# EAGLE board Copy of TP 01 - Cronómetro Binario vuelta (EAGLE 9.7.0)

Size 91.8 x 97.08 mm. Coordinates in mm from the lower left corner, seen from the top.
Outline: 0,0 91.8,0 91.8,97.08 0,97.08 0,0
Copper layers (1*16): Top 0.035mm / dielectric 1.5mm / Bottom 0.035mm
Design rules "default": minimum track width 6mil, minimum drill 0.35mm, track to track 6mil, track to pad 6mil, pad to pad 6mil, via to via 6mil, smd to smd 6mil, copper to edge 40mil, drill to drill 6mil, minimum pad ring 10mil, minimum via ring 8mil, stop-mask expansion 4mil, vias tented up to drill 0mil, thermal gap 10mil

## Footprints (pad centres in the part's own frame; a part is rotated, then mirrored left to right if it is on the bottom)
LEDRD254W60D565H860B_W = drill 0.981 pad 1.581: 1 -1.27,0; 2 1.27,0
LEDRD254W60D565H860B_O = drill 0.981 pad 1.581: 1 -1.27,0; 2 1.27,0
LEDRD254W60D565H860B_Y = drill 0.981 pad 1.581: 1 -1.27,0; 2 1.27,0
LEDRD254W60D565H860B_G = drill 0.981 pad 1.581: 1 -1.27,0; 2 1.27,0
LEDRD254W60D565H860B_B = drill 0.981 pad 1.581: 1 -1.27,0; 2 1.27,0
RESAD1016W63L850D250B = drill 0.83 pad 1.43: 1 -5.08,0; 2 5.08,0
SWITCH-MOMENTARY-PTH-6.5MM = drill 1.016 pad 1.88: 1 -3.251,2.261; 2 3.251,2.261; 3 -3.251,-2.261; 4 3.251,-2.261
ARDUINO-UNO-R3-SHIELD = drill 1.016 pad 1.88: 3.3V 24.13,-2.54; 5V 24.13,0; A0 24.13,12.7; A1 24.13,15.24; A2 24.13,17.78; A3 24.13,20.32; A4 24.13,22.86; A5 24.13,25.4; AREF -24.13,-13.97; D2 -24.13,20.32; D3 -24.13,17.78; D4 -24.13,15.24; D5 -24.13,12.7; D6 -24.13,10.16; D7 -24.13,7.62; D8 -24.13,3.81; D9 -24.13,1.27; D10 -24.13,-1.27; D11 -24.13,-3.81; D12 -24.13,-6.35; D13 -24.13,-8.89; GND@0 24.13,2.54; GND@1 24.13,5.08; GND@2 -24.13,-11.43; IOREF 24.13,-7.62; NC 24.13,-10.16; RES 24.13,-5.08; RX -24.13,25.4; SCL -24.13,-19.05; SDA -24.13,-16.51; TX -24.13,22.86; VIN 24.13,7.62

## Placement (x,y rotation side)
D5  WHITE  [LEDRD254W60D565H860B_W]  6.06,89.17 180 top
D6  ORANGE  [LEDRD254W60D565H860B_O]  51.78,89.17 180 top
D7  ORANGE  [LEDRD254W60D565H860B_O]  46.7,89.17 180 top
D8  YELLOW  [LEDRD254W60D565H860B_Y]  41.62,89.17 180 top
D9  YELLOW  [LEDRD254W60D565H860B_Y]  36.54,89.17 180 top
D10  GREEN  [LEDRD254W60D565H860B_G]  31.46,89.17 180 top
D11  GREEN  [LEDRD254W60D565H860B_G]  26.38,89.17 180 top
D12  BLUE  [LEDRD254W60D565H860B_B]  21.3,89.17 180 top
D13  BLUE  [LEDRD254W60D565H860B_B]  16.22,89.17 180 top
D250  WHITE  [LEDRD254W60D565H860B_W]  11.14,89.17 180 top
R1  1k  [RESAD1016W63L850D250B]  73.56,82.89 90 top
R2  1k  [RESAD1016W63L850D250B]  81,83.3 90 top
R5  250  [RESAD1016W63L850D250B]  53.05,84.09 90 top
R6  250  [RESAD1016W63L850D250B]  47.97,84.09 90 top
R7  250  [RESAD1016W63L850D250B]  42.89,84.09 90 top
R8  250  [RESAD1016W63L850D250B]  37.81,84.09 90 top
R9  250  [RESAD1016W63L850D250B]  32.73,84.09 90 top
R10  250  [RESAD1016W63L850D250B]  27.65,84.09 90 top
R11  250  [RESAD1016W63L850D250B]  22.57,84.09 90 top
R12  250  [RESAD1016W63L850D250B]  17.49,84.09 90 top
R13  250  [RESAD1016W63L850D250B]  12.41,84.09 90 top
R14  250  [RESAD1016W63L850D250B]  7.33,84.09 90 top
S3  SWITCH_MOMENTARY  [SWITCH-MOMENTARY-PTH-6.5MM]  83.54,74.41 90 top
SRESET  SWITCH_MOMENTARY  [SWITCH-MOMENTARY-PTH-6.5MM]  76.1,74 90 top
U1  ARDUINO-UNO-R3-SHIELD  [ARDUINO-UNO-R3-SHIELD]  47.91,29.84 270 top

## Library data of the parts
D5 D250 = Tinkercad; CATEGORY: Opto-Electronic; SUB-CATEGORY: LED; VALUE: LED_WHITE
D6 D7 = Tinkercad; CATEGORY: Opto-Electronic; SUB-CATEGORY: LED; VALUE: LED_ORANGE
D8 D9 = Tinkercad; CATEGORY: Opto-Electronic; SUB-CATEGORY: LED; VALUE: LED_YELLOW
D10 D11 = Tinkercad; CATEGORY: Opto-Electronic; SUB-CATEGORY: LED; VALUE: LED_GREEN
D12 D13 = Tinkercad; CATEGORY: Opto-Electronic; SUB-CATEGORY: LED; VALUE: LED_BLUE
R1 R2 R5-R14 S3 SRESET U1 = Tinkercad

## Nets
D5_A: D5.1 R14.2
D6_A: D6.1 R5.2
D7_A: D7.1 R6.2
D8_A: D8.1 R7.2
D9_A: D9.1 R8.2
D10_A: D10.1 R9.2
D11_A: D11.1 R10.2
D12_A: D12.1 R11.2
D13_A: D13.1 R12.2
D250_A: D250.1 R13.2
U1_5V: S3.3 SRESET.3 U1.5V
U1_D2: R2.1 S3.1 S3.2 U1.D2
U1_D3: R1.1 SRESET.1 SRESET.2 U1.D3
U1_D4: R5.1 U1.D4
U1_D5: R6.1 U1.D5
U1_D6: R7.1 U1.D6
U1_D7: R8.1 U1.D7
U1_D8: R9.1 U1.D8
U1_D9: R10.1 U1.D9
U1_D10: R11.1 U1.D10
U1_D11: R12.1 U1.D11
U1_D12: R13.1 U1.D12
U1_D13: R14.1 U1.D13
U1_GND: D5.2 D6.2 D7.2 D8.2 D9.2 D10.2 D11.2 D12.2 D13.2 D250.2 R1.2 R2.2 U1.GND@0 U1.GND@1 U1.GND@2

## Tracks (layer width: path | path; a pad name or v marks a point on that pad's centre or on a via)
D5_A  (1 unrouted)
D6_A  (1 unrouted)
D7_A  (1 unrouted)
D8_A  (1 unrouted)
D9_A  (1 unrouted)
D10_A  (1 unrouted)
D11_A  (1 unrouted)
D12_A  (1 unrouted)
D13_A  (1 unrouted)
D250_A  (1 unrouted)
U1_5V  (2 unrouted)
U1_D2  (3 unrouted)
U1_D3  (3 unrouted)
U1_D4  (1 unrouted)
U1_D5  (1 unrouted)
U1_D6  (1 unrouted)
U1_D7  (1 unrouted)
U1_D8  (1 unrouted)
U1_D9  (1 unrouted)
U1_D10  (1 unrouted)
U1_D11  (1 unrouted)
U1_D12  (1 unrouted)
U1_D13  (1 unrouted)
U1_GND  (14 unrouted)